# Altium PCB CW308T_87C51.PcbDoc
Units mil, origin at the board's own origin, x right, y up, seen from the top; angles counter-clockwise.
Board outline 2185.04 x 3326.77 mil, 2 copper layers (Top Layer, Bottom Layer); 43 components, 64 nets, 324 pads, 74 vias.
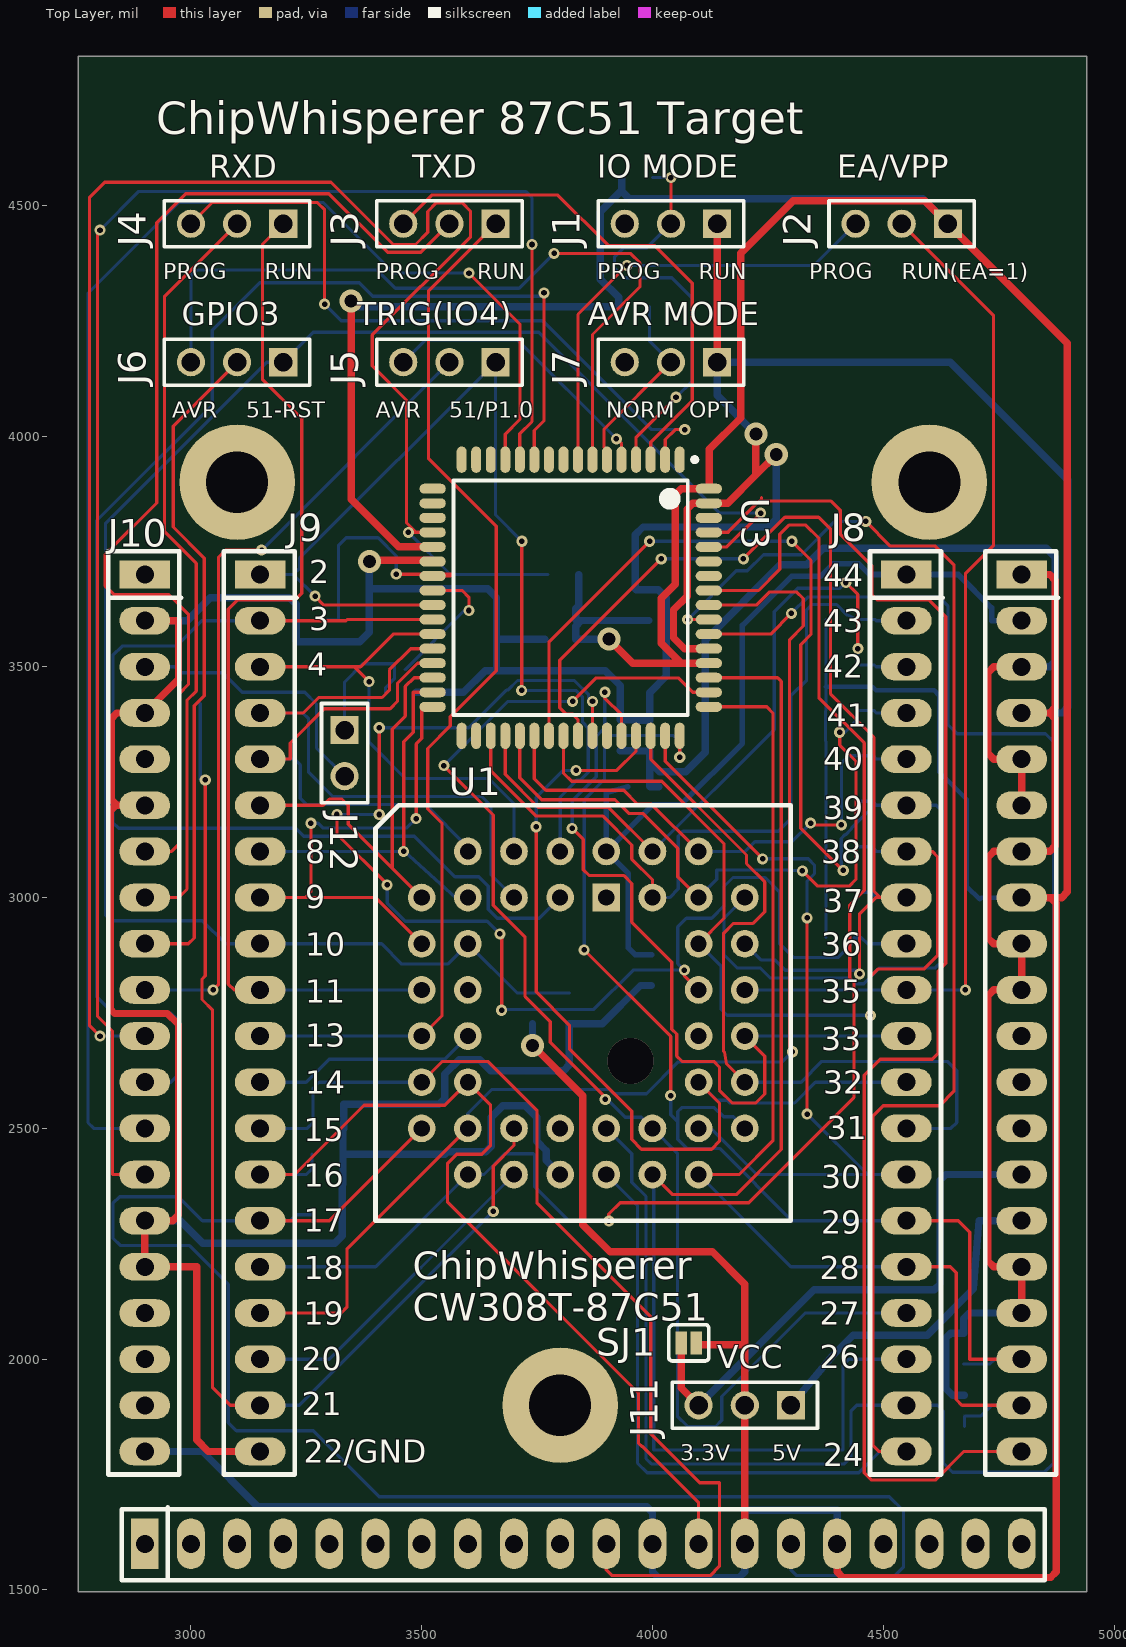
[diagram p0: Top Layer view]
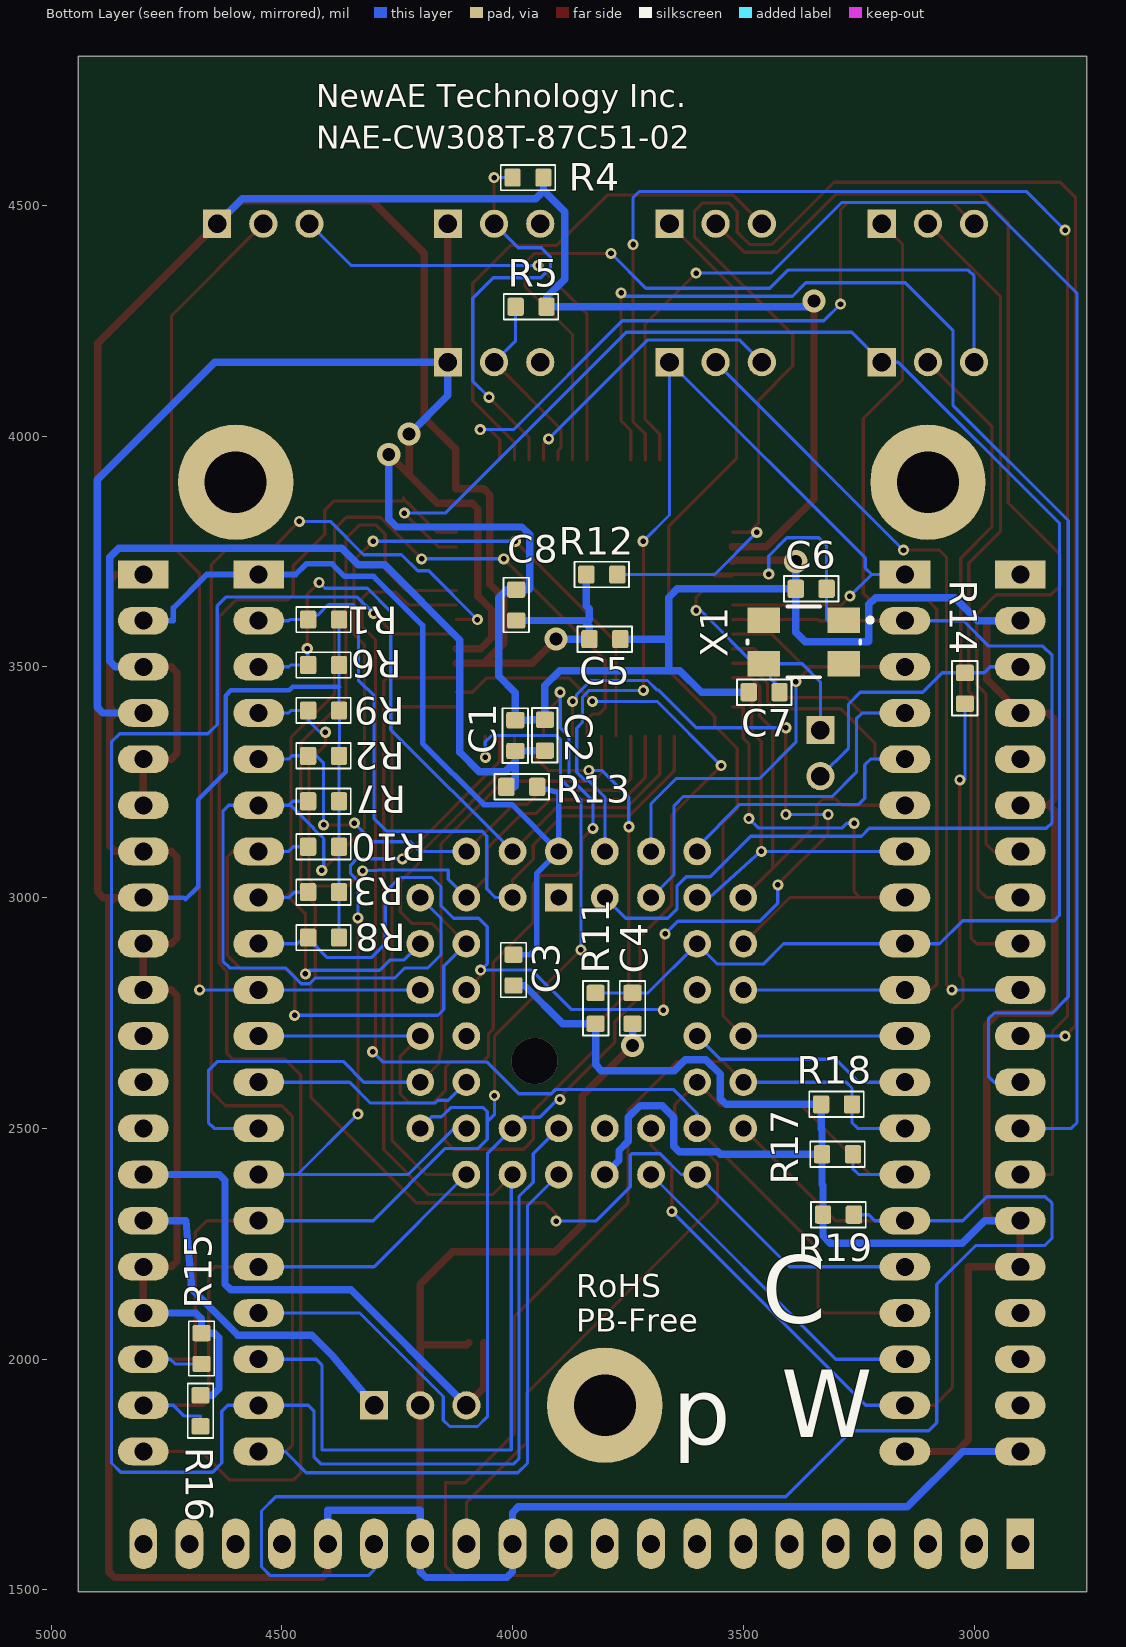
[diagram p1: Bottom Layer view, seen from below]

## Layer stack, top to bottom
Top Solder: solder mask 0.4, Solder Resist, Dk 3.5
Top Layer: signal copper 1.4
Dielectric 1: dielectric 12.6, FR-4, Dk 4.8
Bottom Layer: signal copper 1.4
Bottom Solder: solder mask 0.4, Solder Resist, Dk 3.5

## Board outline
2755.91,1496.06 2755.91,4822.83 4940.94,4822.83 4940.94,1496.06

## Design rules (kind name [scope] priority, off if disabled: settings)
BoardOutlineClearance [All] p1: gap=20 ignorepadtopadclearanceinfootprint=FALSE except(0: Arc-SplitContinuation Track-SplitContinuation SMDPad-SplitContinuation THPad-SplitContinuation Via-SplitContinuation Fill-SplitContinuation Poly-SplitContinuation Region-SplitContinuation Text-SplitContinuation)
Clearance Clearance_VCC [InNetClass('PWR')] p1: gap=10 ignorepadtopadclearanceinfootprint=FALSE except(0: Arc-Hole Track-Hole SMDPad-Hole THPad-Hole Via-Hole Fill-Hole Poly-Hole Region-Hole Text-Hole)
Clearance Clearance_SENSITIVE [InNetClass('SENSITIVE')] p2: gap=11.81 ignorepadtopadclearanceinfootprint=FALSE except(0: Arc-Hole Track-Hole SMDPad-Hole THPad-Hole Via-Hole Fill-Hole Poly-Hole Region-Hole Text-Hole)
Clearance Clearance_NORMAL [All] p3: gap=6 ignorepadtopadclearanceinfootprint=FALSE except(0: Arc-Hole Track-Hole SMDPad-Hole THPad-Hole Via-Hole Fill-Hole Poly-Hole Region-Hole Text-Hole)
PolygonConnect [All] p1: connectstyle=Relief reliefconductorwidth=10 reliefentries=4 polygonreliefangle="90 Angle" airgapwidth=10
RoutingPriority RoutingPriority_SENSITIVE [InNetClass('SENSITIVE')] p1: routingpriority=10
RoutingPriority RoutingPriority_PWR [InNetClass('PWR')] p2: routingpriority=1
RoutingPriority RoutingPriority_ALL [All] p3: routingpriority=0
RoutingVias RoutingVias_PWR [InNetClass('PWR')] p1: holewidth=28 width=50 viastyle="Through Hole" minholewidth=26 minwidth=50 maxholewidth=28 maxwidth=50
RoutingVias [All] p2: holewidth=12 width=24 viastyle="Through Hole" minholewidth=12 minwidth=30 maxholewidth=28 maxwidth=50
SolderMaskExpansion [All] p1: expansion=4
Width Width_SENS [InNetClass('SENSITIVE')] p1: maxlimit=20 minlimit=10 preferedwidth=12 minimp=50.000000 maximp=50.000000 favimp=50.000000
Width WIDTH_PWR [InNetClass('PWR')] p2: maxlimit=100 minlimit=10 preferedwidth=16
Width [All] p3: maxlimit=100 minlimit=6 preferedwidth=7 minimp=50.000000 maximp=50.000000 favimp=50.000000
29 further rules are at their usual default settings.

## Classes and differential pairs
component class CW308T_87C51_CPU: C1 C2 C3 C4 C5 C6 C7 C8 J1 J2 J3 J4 J5 J6 J7 J8 J9 J12 R1 R2 R3 R4 R5 R6 R7 R8 R9 R10 R11 R12 R13 R14 R15 R16 U1 U3 X1
component class CW308T_87C51_CWCONN: J10 J11 R17 R18 R19 SJ1
net class SENSITIVE: SHUNTL
net class PWR: GND NetJ10_C14 NetJ10_C15 SHUNTH VCC
net class CLK: CLK NetJ9_19

## Components (designator, comment, footprint, x,y, rotation, side; value= is the part's Value field where it differs from the comment)
C1 "approved sub OK" CAPC1608X90N 3994,3351 r90 bottom value=100n
C2 "approved sub OK" CAPC1608X90N 3930,3352 r90 bottom value=100n
C3 "approved sub OK" CAPC1608X90N 3998,2843 r90 bottom value=100n
C4 "approved sub OK" CAPC1608X90N 3740,2760 r90 bottom value=100n
C5 "approved sub OK" CAPC1608X90N 3800,3560 r180 bottom value=100n
C6 "27p" CAPC1608X90N 3353,3669 r180 bottom
C7 "27p" CAPC1608X90N 3455,3445 r180 bottom
C8 "approved sub OK" CAPC1608X90N 3992.13,3633.86 r90 bottom value=100n
J1 "68000-203HLF" SMTC-TSW-103-07-X-S 4140,4460 r180 top
J2 "68000-203HLF" SMTC-TSW-103-07-X-S 4640,4460 r180 top
J3 "68000-203HLF" SMTC-TSW-103-07-X-S 3660,4460 r180 top
J4 "68000-203HLF" SMTC-TSW-103-07-X-S 3200,4460 r180 top
J5 "68000-203HLF" SMTC-TSW-103-07-X-S 3660,4160 r180 top
J6 "68000-203HLF" SMTC-TSW-103-07-X-S 3200,4160 r180 top
J7 "68000-203HLF" SMTC-TSW-103-07-X-S 4140,4160 r180 top
J8 "20-Pin Header" 801-87-020-10-001101 4550,3700 r0 top
J9 "20-Pin Header" 801-87-020-10-001101 3150,3700 r0 top
J10 "CW308_TARGETCON" CW308_TBOARD_CONN 2900,3700 r0 top locked
J11 "68000-203HLF" SMTC-TSW-103-07-X-S 4300,1900 r180 top
J12 "DW-02-16-G-S-200" SMTC-DW-02-16-X-S-200 3333,3363 r270 top
R1 "Thick Film" RESC1608X55N 4409.45,3602.36 r0 bottom value=10K
R2 "Thick Film" RESC1608X55N 4409.45,3307.09 r0 bottom value=10K
R3 "Thick Film" RESC1608X55N 4409.45,3011.81 r0 bottom value=10K
R4 "Thick Film" RESC1608X55N 3966.54,4560 r0 bottom value=10K
R5 "Thick Film" RESC1608X55N 3960,4280 r180 bottom value=10K
R6 "Thick Film" RESC1608X55N 4409.45,3503.94 r0 bottom value=10K
R7 "Thick Film" RESC1608X55N 4409.45,3208.66 r0 bottom value=10K
R8 "Thick Film" RESC1608X55N 4409.45,2913.39 r0 bottom value=10K
R9 "Thick Film" RESC1608X55N 4409.45,3405.51 r0 bottom value=10K
R10 "Thick Film" RESC1608X55N 4409.45,3110.24 r0 bottom value=10K
R11 "Thick Film" RESC1608X55N 3820,2760 r270 bottom value=10K
R12 "Thick Film" RESC1608X55N 3806.54,3700 r180 bottom value=10K
R13 "Thick Film" RESC1608X55N 3980,3240 r180 bottom value=51R
R14 "Thick Film" RESC1608X55N 3020,3453.46 r90 bottom value=51R
R15 "Thick Film" RESC1608X55N 4674,2023 r90 bottom value=10K
R16 "Thick Film" RESC1608X55N 4676,1888 r90 bottom value=10K
R17 "Thick Film" RESC1608X55N 3296,2444 r0 bottom value=10K
R18 "Thick Film" RESC1608X55N 3298,2552 r0 bottom value=10K
R19 "Thick Film" RESC1608X55N 3294,2313 r180 bottom value=10K
SJ1 "NC" SJ_2S_NC 4078.74,2035.43 r0 top
U1 "87C51" PLCC44_SOCKET 3500,3100 r0 top
U3 "ATmega325PA-AU" 64A_L 3822.83,3649.61 r270 top
X1 "ABMM2-8.000MHZ-E2-T" ABRA-ABMM2-4_V 3369,3554 r0 bottom

## Footprints (in the part's own frame and the unit in brackets; to place one, negate y for a bottom-side part, rotate by r counter-clockwise, add the part's x,y. Pads: shape width x height; smd on the part's side, far side on the other; paste and mask are expansions set on the pad)
64A_L [mm] "Thin QFP, 64-Leads, Body 14x14mm, Pitch 0.8mm, IPC High Density"
  oval 1.45x0.55 smd: 1(-7.6,6) 2(-7.6,5.2) 3(-7.6,4.4) 4(-7.6,3.6) 5(-7.6,2.8) 6(-7.6,2) 7(-7.6,1.2) 8(-7.6,0.4) 9(-7.6,-0.4) 10(-7.6,-1.2) 11(-7.6,-2) 12(-7.6,-2.8) 13(-7.6,-3.6) 14(-7.6,-4.4) 15(-7.6,-5.2) 16(-7.6,-6) 33(7.6,-6) 34(7.6,-5.2) 35(7.6,-4.4) 36(7.6,-3.6) 37(7.6,-2.8) 38(7.6,-2) 39(7.6,-1.2) 40(7.6,-0.4) 41(7.6,0.4) 42(7.6,1.2) 43(7.6,2) 44(7.6,2.8) 45(7.6,3.6) 46(7.6,4.4) 47(7.6,5.2) 48(7.6,6)
  oval 0.55x1.45 smd: 17(-6,-7.6) 18(-5.2,-7.6) 19(-4.4,-7.6) 20(-3.6,-7.6) 21(-2.8,-7.6) 22(-2,-7.6) 23(-1.2,-7.6) 24(-0.4,-7.6) 25(0.4,-7.6) 26(1.2,-7.6) 27(2,-7.6) 28(2.8,-7.6) 29(3.6,-7.6) 30(4.4,-7.6) 31(5.2,-7.6) 32(6,-7.6) 49(6,7.6) 50(5.2,7.6) 51(4.4,7.6) 52(3.6,7.6) 53(2.8,7.6) 54(2,7.6) 55(1.2,7.6) 56(0.4,7.6) 57(-0.4,7.6) 58(-1.2,7.6) 59(-2,7.6) 60(-2.8,7.6) 61(-3.6,7.6) 62(-4.4,7.6) 63(-5.2,7.6) 64(-6,7.6)
  silkscreen extent -7.72,-6.45 6.45,6.95, body extent -7,-7 7,7, height 1.6
801-87-020-10-001101 [mil]
  rect 110x60 hole 39: 1(0,0)
  oval 110x60 hole 39: 2(0,-100) 3(0,-200) 4(0,-300) 5(0,-400) 6(0,-500) 7(0,-600) 8(0,-700) 9(0,-800) 10(0,-900) 11(0,-1000) 12(0,-1100) 13(0,-1200) 14(0,-1300) 15(0,-1400) 16(0,-1500) 17(0,-1600) 18(0,-1700) 19(0,-1800) 20(0,-1900)
  silkscreen extent -79,-1950 79,50, body extent -50,-1950 50,50, height 224
ABRA-ABMM2-4_V [mm] "SMD, 4-Leads, Body 6.2x3.9mm, Pitch 4.4mm, Height 1.2mm"
  rect 1.8x1.4 smd: 1(-2.2,-1.2) 2(2.2,-1.2) 3(2.2,1.2) 4(-2.2,1.2)
  silkscreen extent -3.77,-1.95 3.1,1.95, body extent -3.1,-1.95 3.1,1.95, height 1.2
CAPC1608X90N [mm] "Chip Capacitor, Body 1.6x0.8mm, EIA 0603, IPC Medium Density"
  round 0.254 on Mech15: 0(0,0)
  rrect25% 0.9x1 smd: 1(-0.85,0) 2(0.85,0)
  Top Layer pour cut-out: -0.6,0.5 -0.4,0.7 0.4,0.7 0.6,0.5 0.6,-0.5 0.4,-0.7 -0.4,-0.7 -0.6,-0.5
  silkscreen extent -1.5,-0.7 1.5,0.7, body extent -0.85,-0.45 0.85,0.45, height 0.89
CW308_TBOARD_CONN [mil]
  rect 110x60 hole 39: A1(0,0) C1(1900,0)
  oval 110x60 hole 39: A2(0,-100) A3(0,-200) A4(0,-300) A5(0,-400) A6(0,-500) A7(0,-600) A8(0,-700) A9(0,-800) A10(0,-900) A11(0,-1000) A12(0,-1100) A13(0,-1200) A14(0,-1300) A15(0,-1400) A16(0,-1500) A17(0,-1600) A18(0,-1700) A19(0,-1800) A20(0,-1900) C2(1900,-100) C3(1900,-200) C4(1900,-300) C5(1900,-400) C6(1900,-500) C7(1900,-600) C8(1900,-700) C9(1900,-800) C10(1900,-900) C11(1900,-1000) C12(1900,-1100) C13(1900,-1200) C14(1900,-1300) C15(1900,-1400) C16(1900,-1500) C17(1900,-1600) C18(1900,-1700) C19(1900,-1800) C20(1900,-1900)
  rect 60x110 hole 39: B1(0,-2100)
  oval 60x110 hole 39: B2(100,-2100) B3(200,-2100) B4(300,-2100) B5(400,-2100) B6(500,-2100) B7(600,-2100) B8(700,-2100) B9(800,-2100) B10(900,-2100) B11(1000,-2100) B12(1100,-2100) B13(1200,-2100) B14(1300,-2100) B15(1400,-2100) B16(1500,-2100) B17(1600,-2100) B18(1700,-2100) B19(1800,-2100) B20(1900,-2100)
  round 250 hole 134: MH1(200,200) MH2(900,-1800) MH2(1700,200)
  silkscreen extent -79,-2179 1979,50, body extent -50,-2150 1950,50, height 224
PLCC44_SOCKET [mil]
  rect 60x60 hole 35: 1(400,-100)
  round 60 hole 35: 2(300,0) 3(300,-100) 4(200,0) 5(200,-100) 6(100,0) 7(0,-100) 8(100,-100) 9(0,-200) 10(100,-200) 11(0,-300) 12(100,-300) 13(0,-400) 14(100,-400) 15(0,-500) 16(100,-500) 17(0,-600) 18(100,-700) 19(100,-600) 20(200,-700) 21(200,-600) 22(300,-700) 23(300,-600) 24(400,-700) 25(400,-600) 26(500,-700) 27(500,-600) 28(600,-700) 29(700,-600) 30(600,-600) 31(700,-500) 32(600,-500) 33(700,-400) 34(600,-400) 35(700,-300) 36(600,-300) 37(700,-200) 38(600,-200) 39(700,-100) 40(600,0) 41(600,-100) 42(500,0) 43(500,-100) 44(400,0)
  silkscreen extent -100,-800 800,100, body extent -92,-792 792,92, height 302
RESC1608X55N [mm] "Chip Resistor, Body 1.6x0.8mm, EIA 0603, IPC Medium Density"
  round 0.254 on Mech15: 0(0,0)
  rrect25% 0.9x1 smd: 1(-0.85,0) 2(0.85,0)
  Top Layer pour cut-out: -0.6,0.5 -0.4,0.7 0.4,0.7 0.6,0.5 0.6,-0.5 0.4,-0.7 -0.4,-0.7 -0.6,-0.5
  silkscreen extent -1.5,-0.7 1.5,0.7, body extent -0.87,-0.47 0.88,0.48, height 0.54
SJ_2S_NC [mil] "Solder Jumper, closed with solder paste"
  rect 25x50 smd: 1(-16.22,0) 2(16.22,0)
  silkscreen extent -43,-39 43,39
SMTC-DW-02-16-X-S-200 [mm] "Low Cost Board Spacer, 1x2 Pins, Vertical, 2.54mm Pitch, Male"
  rect 1.55x1.55 hole 1.02: 1(0,0)
  round 1.55 hole 1.02: 2(2.54,0)
  silkscreen extent -1.46,-1.27 4,1.27, body extent -1.4,-1.27 3.81,1.27, height 8.51
SMTC-TSW-103-07-X-S [mm] ".025 SQ Post Terminal Strip Assembly, 1x3 Pins, Vertical, 2.54mm Pitch, Male"
  rect 1.55x1.55 hole 1.02: 1(0,0)
  round 1.55 hole 1.02: 2(2.54,0) 3(5.08,0)
  silkscreen extent -1.46,-1.27 6.54,1.27, body extent -1.27,-1.27 6.35,1.27, height 8.38

## Part data
C1 C2 C3 C4 C5 C8: library part CAPC_100n_0603_X7R_50V_10%, "Capacitor SMD Cer 100nF 10% 50V X7R 0603", Manufacturer 1="AVX Corporation", Manufacturer 2="TDK Corporation", Manufacturer Part Number 1=06035C104KAT2A, Manufacturer Part Number 2=C1608X7R1H104K, Package / Case="0603 (1608 Metric)", Ratings="50V; X7R", Supplier Part Number 1=478-5052-1-ND, Tolerance=±10%, ComponentLink1Description=http://www.avx.com/docs/Catalogs/cx7r.pdf, ComponentLink1URL=http://www.avx.com/docs/Catalogs/cx7r.pdf, ComponentLink2Description=http://product.tdk.com/capacitor/mlcc/en/documents/mlcc_commercial_general_en.pdf, ComponentLink2URL=http://product.tdk.com/capacitor/mlcc/en/documents/mlcc_commercial_general_en.pdf, Material=ceramic, SCDType=spec, Supplier 1=Digi-Key, Supplier 2=Digi-Key, Supplier Part Number 2=445-1314-1-ND
C6 C7: library part CAPC_27p_0603_NP0_100V_1%, "Capacitor SMD Cer 27pF 1% 100V NP0 0603", Manufacturer 1="AVX Corporation", Manufacturer Part Number 1=06031A270FAT2A, Operating Temperature="-55°C ~ 125°C", Package / Case="0603 (1608 Metric)", Ratings="100V; NP0", Supplier Part Number 1=478-3681-1-ND, Tolerance=±1%, SCDType=undef, Supplier 1=Digi-Key
J1 J2 J3 J4 J5 J6 J7 J11: library part CMP-1024-00333-1, Manufacturer=Samtec, Supplier Part Number 1=609-3464-ND, Temperature Range="-55 to 125 degC", Mounting Technology=Through-hole, Orientation=Vertical, PackageDescription=".025[0.64] SQ. Post Terminal Strip Assembly", PartNumber=68000-203HLF, Pitch="2.54 mm", RoHS=True, Supplier 1=Digi-Key
J8 J9: library part 801-87-020-10-001101, "1x20 Header, Machined", Manufacture 1="Preci-Dip SA", Supplier Part Number 1=1212-1207-ND, Manufacture Part Number 1=801-87-020-10-001101, Supplier 1=Digi-Key
J10: library part CW308_TBOARD, "CW308 \"Standard\" Target Board Connector"
J12: library part CMP-1024-00001-1, Manufacturer=Samtec, Temperature Range="-55 to 125 degC", ComponentLink1Description="Manufacturer URL", ComponentLink1URL=http://www.samtec.com, ComponentLink2Description=Datasheet, ComponentLink2URL=http://www.samtec.com/documents/webfiles/pdf/DW.PDF, ComponentLink3Description="Package Specification", ComponentLink3URL=http://www.samtec.com/documents/webfiles/cpdf/XW-XX-XX-XXX-X-XXXX-XXX-XX-XXX-MKT1.PDF, DatasheetVersion=F-214, Mounting Technology=Through-hole, Orientation=Vertical, PackageDescription="Low Cost Board Spacer", PackageReference=DW-02-16-X-S-200, PackageVersion="AX, 8/1984", PartNumber=DW-02-16-G-S-200, Pitch="2.54 mm", RoHS=True
R1 R2 R3 R4 R5 R6 R7 R8 R9 R10 R11 R12 R15 R16 R17 R18 R19: library part RES_10K_0603_1%, "Resistor SMD chip 10k Ohm 0.1W 1% 0603", Manufacturer 1=Yageo, Manufacturer Part Number 1=RC0603FR-0710KL, Package / Case="0603 (1608 Metric)", Ratings=1/10W, Supplier Part Number 1=311-10.0KHRCT-ND, Tolerance=±1%, SCDType=spec, Supplier 1=Digi-Key
R13 R14: library part RES_51R_0603_1%, "Resistor SMD chip 51 Ohm 0.1W 1% 0603", Manufacturer 1=Yageo, Manufacturer Part Number 1=RC0603FR-0751RL, Package / Case="0603 (1608 metric)", Ratings="1/10 W", Supplier Part Number 1=311-51.0HRCT-ND, Tolerance=±1%, Material="Thick Film", SCDType=spec, Supplier 1=Digi-Key
SJ1: library part SJ_2S, "Solder Jumper, NC", Component Group="PCB Feature", Component Type="Standard (No BOM)", Mounting Technology=COPPER, Part Number=SJ_2S, Pin Count=2
U3: library part CMP-0095-00596-1, "8-bit AVR Microcontroller, 1.5-5.5V, 32KB Flash, 1KB EEPROM, 2KB SRAM, 64-pin TQFP, Industrial Grade (-40°C to 85°C)", Code_JEDEC=MS-026-AEB, ComponentLink1Description="Manufacturer URL", ComponentLink1URL=http://www.atmel.com/, ComponentLink2Description="ATmega165A/PA/325A/PA/3250A/PA/645A/P/6450A/P Datasheet", ComponentLink2URL=http://www.atmel.com/dyn/resources/prod_documents/doc8285.pdf, ComponentLink3Description="ATmega165A/PA/325A/PA/3250A/PA/645A/P/6450A/P Summary", ComponentLink3URL=http://www.atmel.com/dyn/resources/prod_documents/8285S.pdf, DatasheetVersion="revD, Jun-2011", PackageDescription="64-Pin Plastic Thin Profile Quad Flat Pack, 14 x 14 x 1.0 mm Body, 0.8 mm Pitch (TQFP)", PackageReference=64A, PackageVersion="revC, Oct-2010"
X1: library part CMP-0277-00003-1, "Ceramic Surface Mount Low Profile Quartz Crystal, 8 MHz, -20 to 70 degC, 4-Pin 6 x 3.6 x 1.2 mm SMD, RoHS, 1000pcs / Reel", Frequency="8 MHz", Load Capacitance CL="18 pF Typ.", Manufacturer=Abracon, Shunt Capacitance C0="7 pF Max.", Temperature Range="-20 to 70 degC", ComponentLink1Description="Manufacturer URL", ComponentLink1URL=http://www.abracon.com/, ComponentLink2Description=Datasheet, ComponentLink2URL=http://www.abracon.com/Resonators/ABMM2.pdf, ComponentLink3Description="Package Specification", ComponentLink3URL=http://www.abracon.com/Resonators/ABMM2.pdf, DatasheetVersion=Jan-13, ESR="72 Ohm Max.", Mounting Technology="Surface Mount", PackageDescription="4-Pin SMD, Body 6 x 3.6 mm, Pitch 4.4 mm", Packing="1000pcs / Reel", PartNumber=ABMM2-8.000MHZ-E2-T, RoHS=TRUE

## Via types
v1: diameter 24, hole 12, Top Layer to Bottom Layer, 53 vias
v2: diameter 24, hole 12, Top Layer to Bottom Layer, tented both sides, 14 vias
v3: diameter 50, hole 28, Top Layer to Bottom Layer, 6 vias
v4: diameter 100, hole 100, Top Layer to Bottom Layer, 1 vias

## Nets (pads, with @x,y where several pads share a name; then routed paths per layer and width w, separated by ;. In a path a pad name is that pad's centre, name@x,y a point inside that pad or via, vN(x,y) a via of type N, cw(c..) or ccw(c..) an arc to the next point about the centre after c; other vN are vias at no path point)
51_RESET: C4.2 J6.1 J9.9 R11.1 U1.10 U3.60 | length 3856.7
  Top Layer w7: U3.60 4161.34,3759.84 v1(4234.5,3833)
  Bottom Layer w7: R11.1 C4.2 3706.54,2793.46 U1.10 3556,2856 3457,2856 3413,2900 J9.9 3075,2900 3025,2950 2826.5,2950 2815,2961.5 2815,3811 3164,4160 J6.1 3265.01,4225.01 3753.99,4225.01 4146,3833 v1(4234.5,3833)
51_RX: J4.1 J9.10 U1.11 | length 2264.6
  Top Layer w7: J9.10 3093.5,2800 3081,2812.5 3081,3625 3101,3645 3226,3645 3240,3659 3240,4038 3155,4123 3155,4415 J4.1
  Bottom Layer w7: J9.10 U1.11
51_TX: J3.1 J9.11 U1.13 | length 2323.3
  Top Layer w7: U1.13 3544,2744 3544,3161 3513,3192 3513,3323 3562,3372 3562,3392 3661.42,3491.42 3661.42,3804.58 3515,3951 3515,4315 J3.1
  Bottom Layer w7: J9.11 U1.13
ALE/PROG: J8.11 U1.33 U3.44 | length 1828.9
  Top Layer w7: v1(3826,3150) 3850,3126 3850,3060.5 3862.5,3048 3937.5,3048 3955,3030.5 3955,2947 4042,2860 4042,2714.88 4052.37,2704.51 4052.37,2656.63 4064,2645 4133,2645 4145,2633 4145,2583 4173,2555 4224,2555 4243.5,2574.5 4243.5,2656.5 U1.33 ; v2(3896.81,3444.88) 3896.81,3432.19 3933.07,3395.93 U3.44
  Bottom Layer w7: v1(3826,3150) 3826,3210.04 3878,3262.04 3878,3349 3896.81,3367.81 v2(3896.81,3444.88) ; U1.33 J8.11
AVR_EA: J2.3 U3.8 | length 997.5
  Top Layer w7: U3.8 3838.58,4263.58 v1(3944.5,4369.5)
  Bottom Layer w7: v1(3944.5,4369.5) 4349.5,4369.5 J2.3
AVR_GPIO3: J6.3 U3.7 | length 1690.3
  Top Layer w7: v1(3786.73,4395.73) 3952.27,4395.73 3973,4375 3973,4323 3870.08,4220.08 U3.7
  Bottom Layer w7: J6.3 3000,4347 3012.5,4359.5 3403.5,4359.5 3443,4320 3711,4320 v1(3786.73,4395.73)
AVR_MODE1: J1.2 R4.2 U3.4 | length 911.8
  Top Layer w7: U3.4 3964.57,3997.57 v1(4051,4084) ; J1.2 v1(4040,4560)
  Bottom Layer w7: R4.2 v1(4040,4560) ; J1.2 3988,4408 3937.5,4408 3918,4388.5 3918,4363.5 3938.5,4343 4042,4343 4086,4299 4086,4119 v1(4051,4084)
AVR_MODE2: J7.2 R5.1 U3.6 | length 413.2
  Top Layer w7: U3.6 3901.57,3968.5 3895,3975.07 3895,4015 J7.2
  Bottom Layer w7: R5.1 3993.46,4206.54 J7.2
AVR_RST: J10.A11 R12.2 U3.20 | length 4105.1
  Top Layer w7: v1(2803,2700) 2780.5,2722.5 2780.5,4517.5 2813,4550 3303.49,4550 3438.49,4415 3486.51,4415 3513,4441.49 3513,4486.5 3531.5,4505 3587.5,4505 3606,4486.5 3606,4432 3393,4219 3393,4152 3467,4078 3467,3811.84 3487.5,3791.34 ; v2(3471,3791.34) 3487.5,3791.34 ; U3.20 3487.5,3791.34
  Bottom Layer w7: v1(2803,2700) J10.A11 ; v2(3471,3791.34) 3562.34,3700 R12.2
AVR_RX: J4.3 U3.2 | length 1507.7
  Top Layer w7: J4.3 3046,4506 3274,4506 3289.5,4490.5 v1(3289.5,4286) ; U3.2 4027.56,3992.56 4049,4014 v2(4070,4014)
  Bottom Layer w7: v1(3289.5,4286) 3325.5,4250 3762,4250 3998,4014 v2(4070,4014)
AVR_TRIG: J5.3 U3.5 | length 620.3
  Top Layer w7: v2(3922,3994) 3933.07,3982.93 U3.5
  Bottom Layer w7: J5.3 3508.01,4208.01 3707.99,4208.01 v2(3922,3994)
AVR_TX: J3.3 U3.3 | length 1150.1
  Top Layer w7: J3.3 3522,4522 3795,4522 3904,4413 4003.82,4413 4086,4330.82 4086,4076.43 3996.06,3986.5 U3.3
CLK: J10.A3 J12.2 R14.2 | length 587.1
  Bottom Layer w7: J10.A3 2965,3500 2978.07,3486.93 R14.2 3069,3486.93 3110.93,3445 3246.5,3445 3272,3419.5 3272,3324 J12.2
EA/VPP: J2.2 J8.10 U1.35 | length 2245.7
  Top Layer w7: J2.2 4739,4261 4739,3763 4678,3702 v1(4678,2800)
  Bottom Layer w7: U1.35 J8.10 v1(4678,2800)
GND: C1.2 C2.2 C3.1 C5.2 C6.1 C7.1 C8.2 J1.1 J7.1 J9.20 J10.A2 J10.A4 J10.A6 J10.A15 J10.A16 J10.C1 J10.C4 J10.C7 J10.C9 J10.C10 J10.C16 J10.C17 R11.2 R15.2 R16.2 R17.2 R18.2 R19.1 U1.22 U3.22 U3.53 U3.63 | length 12816.8
  Top Layer w16: J10.A6 2839.5,3200 ; J10.A2 2973,3600 2973,3473 J10.A4 2839.5,3400 2827,3387.5 2827,3212.5 2839.5,3200 ; J9.20 3037.5,1800 3012.5,1825 3012.5,2200 J10.A16 J10.A15 2960.5,2300 2973,2312.5 2973,2725 2949,2749 2834.5,2749 2825,2758.5 2825,3187.5 2837.5,3200 2839.5,3200 ; v3(3386.46,3728.35) 3388.91,3730.79 3521.18,3730.79 U3.22 ; U3.53 4069.41,3539.37 4045.5,3563.28 4045.5,3623.28 4075,3652.78 4075,3841.83 4087.5,3854.33 U3.63 4162.83,3854.33 4224,3915.5 ; J7.1 J1.1 ; v3(4224,4004) 4224,3915.5 ; v3(4268.25,3959.75) 4224,3915.5 ; J10.C17 J10.C16 4739.5,2200 4727,2212.5 4727,2787.5 4739.5,2800 J10.C10 J10.C9 4739.5,2900 4727,2912.5 4727,3087.5 4739.5,3100 J10.C7 4860.5,3100 4873,3112.5 4873,3387.5 4860.5,3400 ; J10.C4 4860.5,3400 ; J10.C1 4860.5,3700 4873,3687.5 4873,3412.5 4860.5,3400
  Bottom Layer w16: J10.A15 2977,2300 3026,2251 3311.5,2251 3327.46,2266.96 R19.1 3327.46,2377 3329.46,2379 R17.2 ; J10.A2 2992,3600 3042,3650 3213.5,3650 3228,3635.5 3228,3555 3229,3554 3365.46,3554 3386.46,3575 C6.1 ; v3(3386.46,3728.35) C6.1 ; C7.1 3590.67,3445 3637.48,3491.81 3897.69,3491.81 3930,3459.5 C2.2 3961,3385.46 3962,3384.46 C1.2 3994,3444 4030,3480 4030,3650 4012.68,3667.32 C8.2 3965,3667.32 3963,3669.32 3963,3786.5 3979.5,3803 4251,3803 4268.25,3820.25 v3(4268.25,3959.75) ; 3662,3492.13 3662,3560 ; C5.2 3662,3560 ; U1.22 3769.44,2430.56 3769.44,2452 3749,2472.44 3749,2524 3724,2549 3676,2549 3651,2524 3651,2461.5 3638.5,2449 3555,2449 3550,2444 R17.2 ; C3.1 3974,2809.54 3891,2726.54 R11.2 3820,2637.5 3807.5,2625 3650,2625 3626,2649 3581.12,2649 3550,2617.88 3550,2564.5 3537.5,2552 R18.2 3331.46,2499 3329.46,2497 R17.2 ; v3(4224,4004) 4140,4088 J7.1 4645,4160 4900,3905 4900,3412.5 4887.5,3400 J10.C4 ; R16.2 4650,1921.46 4636,1935.46 4636,2045.98 4646.48,2056.46 R15.2 4674,2087.5 4686.5,2100 J10.C17 ; C6.1 3643,3669 3662,3650 3662,3560
GPIO3: J6.2 J10.A9 | length 1454.1
  Top Layer w7: J10.A9 2994.5,2900 3007,2912.5 3007,3415.5 3029,3437.5 3029,3735.44 2961.5,3802.94 2961.5,4021.5 J6.2
GPIO4: J5.2 J10.A10 | length 1765.8
  Top Layer w7: v1(3048,2800) 3060,2812 3060,3738 3075,3753 v1(3153,3753)
  Bottom Layer w7: J10.A10 v1(3048,2800) ; v1(3153,3753) J5.2
LED1: J8.15 J10.C18 R15.1 U1.29 U3.48 | length 2643.8
  Top Layer w7: v1(3852,2886.5) 4039.37,2699.13 v1(4039.37,2570.87) ; v2(4059.06,3304) U3.48 ; J8.15 4662.5,2300 4687.5,2275 4687.5,2000 J10.C18
  Bottom Layer w7: v1(3852,2886.5) 3852,3212 3896,3256 3896,3341.92 3905.08,3351 4045.56,3351 4059.06,3337.5 v2(4059.06,3304) ; v1(4039.37,2570.87) 4039.37,2529.63 4055,2514 ; U1.29 4175,2525 4154,2525 4134,2545 4063.5,2545 4055,2536.5 4055,2514 ; J8.15 4301.96,2300 4145.46,2456.5 4074.5,2456.5 4055,2476 4055,2514 ; R15.1 4731,1989.54 4741.46,2000 J10.C18
LED2: J8.16 J10.C19 R16.1 U1.28 U3.49 | length 2486.3
  Top Layer w7: U1.28 4188,2400 4261,2473 4261,3400 4247.61,3413.39 U3.49 ; J8.16 4645.5,2200 4658,2187.5 4658,1912.5 4670.5,1900 J10.C19
  Bottom Layer w7: U1.28 4300,2200 J8.16 ; R16.1 4676,1876 4677,1877 4712,1877 4735,1900 J10.C19
LED3: J10.C20 U3.61 | length 3089.4
  Top Layer w7: U3.61 4164,3791.34 4164,3792.91 4225.59,3854.5 4227.16,3854.5 4231.66,3859 ; 4236.22,3866.14 4236.22,3863.56 4231.66,3859 ; J10.C20 4675,1800 4613,1738 4475,1738 4459,1754 4459,2615.5 4493.5,2650 4606.5,2650 4619,2662.5 4619,2840.79 4635.5,2857.29 4635.5,3608.5 4599,3645 4486.5,3645 4475,3656.5 4475,3719 4407,3787 4407,3839 4387,3859 4231.66,3859
M0: J9.13 J10.B11 R18.1 U1.15 | length 2238.9
  Top Layer w7: U1.15 3545,2645 3643,2645 3750,2538 3750,2338.01 3996.06,2091.95 3996.06,1838.58 4102.36,1732.28 4145,1732.28 4145,1551 4125,1531 3912.5,1531 3900,1543.5 J10.B11
  Bottom Layer w7: J9.13 3252.04,2500 3264.54,2512.5 R18.1 3264.54,2587.5 3277.04,2600 U1.15
M1: J9.14 J10.B13 R17.1 U1.16 | length 1999.1
  Top Layer w7: J9.14 3225,2400 3375,2550 3550,2550 U1.16 3648.8,2551.2 3648.8,2462.5 3630.3,2444 3575.5,2444 3556,2424.5 3556,2340 3969.65,1926.35 3969.65,1817.75 3976.38,1811.02 3977.95,1811.02 4100,1688.98 J10.B13
  Bottom Layer w7: J9.14 3250.04,2400 3262.54,2412.5 R17.1
M2: J9.15 J10.B15 R19.2 U1.17 | length 3538.3
  Top Layer w7: J9.15 3300,2300 U1.17
  Bottom Layer w7: R19.2 3228,2313 3215,2300 J9.15 3025,2300 2973,2352 2845.5,2352 2831,2337.5 2831,2262.5 2847.5,2246 2997,2246 3081,2162 3081,1862.5 3098.5,1845 3265,1845 3408,1702 4513,1702 4544,1671 4544,1550 4525,1531 4312.5,1531 4300,1543.5 J10.B15
MISO: J10.A13 U3.13 | length 3358.6
  Top Layer w7: v1(3602.5,4353) 3713,4242.5 3713,4036 3681.1,4004.1 U3.13
  Bottom Layer w7: J10.A13 2789.5,2500 2777,2512.5 2777,4309.5 2973.5,4506 3287,4506 3440,4353 v1(3602.5,4353)
MOSI: J10.A14 U3.12 | length 3686.5
  Top Layer w7: v1(2803,4446) 2797.5,4440.5 2797.5,2743.5 2830,2711 2830,2400 J10.A14 ; U3.12 3712.6,4005 3739,4031.4 v1(3739,4415)
  Bottom Layer w7: v1(2803,4446) 2887,4530 3725,4530 3739,4516 v1(3739,4415)
NetC6_2: C6.2 U3.23 X1.1 | length 551.6
  Top Layer w7: v1(3444.88,3700.79) 3566.44,3700.79 3562.5,3696.85 U3.23
  Bottom Layer w7: X1.1 3318,3601.24 3319.54,3602.78 C6.2 3319.54,3762.5 3336.56,3779.53 3405.51,3779.53 3444.88,3740.16 v1(3444.88,3700.79)
NetC7_2: C7.2 J12.1 U3.24 X1.3 | length 603.3
  Top Layer w7: U3.24 3588,3665.35 3602.36,3650.99 v1(3602.36,3622.05)
  Bottom Layer w7: J12.1 3333,3467.18 3372.57,3506.76 3440.94,3506.76 3440.94,3474.25 3421.54,3454.84 C7.2 ; X1.3@3464,3494 3592.05,3622.05 v1(3602.36,3622.05)
NetJ9_12: J9.12 U1.14 | length 491.4
  Bottom Layer w7: J9.12 3249.61,2600 3299.61,2650 3550,2650 U1.14
NetJ9_18: J9.18 U1.20 | length 715.7
  Bottom Layer w7: J9.18 3300,2000 U1.20
NetJ9_19: J9.19 R14.1 U1.21 | length 2501.2
  Top Layer w7: v1(3031,3255) 3031,2830.21 3024,2823.21 3024,2779.15 3047,2756.15 3047,1938 3085,1900 J9.19 ; v1(3655,2320) 3655,2418 3700,2463 U1.21
  Bottom Layer w7: R14.1 3020,3256 3021,3255 v1(3031,3255) ; J9.19 3235,1900 v1(3655,2320)
NetJ10_C14: J10.C14 J11.3 SJ1.1 | length 1189.9
  Top Layer w16: SJ1.1 4062.52,1937.48 J11.3
  Bottom Layer w16: J11.3 4350,2150 4610.5,2150 4623,2162.5 4623,2387.5 4635.5,2400 J10.C14
NetJ10_C15: J10.C15 J11.1 | length 746.1
  Bottom Layer w16: J11.1 4390.5,2008 4434.5,2052 4595,2052 4695,2152 4707.5,2300 J10.C15
NetR1_1: 
P2.6: J8.14 U1.30 U3.47 | length 1694.7
  Top Layer w7: U3.47 4027.56,3294.94 v1(4238.5,3084) ; v1(4335,2531) v1(4335,2956)
  Bottom Layer w7: U1.30 4126,2500 4226,2400 4466,2400 ; v1(4238.5,3084) 4337.5,3084 4351,3070.5 4351,3052 4335,3036 v1(4335,2956) ; v1(4335,2531) 4466,2400 ; J8.14 4485,2400 4466,2400
P2.7: J8.13 U1.31 U3.46 | length 1645
  Top Layer w7: U3.46 3996.06,3300 4203.78,3092.29 4203.78,3073.79 4243.5,3034.06 4243.5,2969.5 4218,2944 4175.5,2944 4154,2922.5 4154,2667 4156,2665 4160.5,2639.5 U1.31
  Bottom Layer w7: U1.31 4322,2600 4367,2645 4639,2645 4659,2625 4659,2512.5 4646.5,2500 J8.13
P3.6: J9.16 U1.18 U3.57 | length 3231.9
  Top Layer w7: v1(3905.51,2299.21) 3905.51,2314.51 3930,2339 4208.73,2339 4436.5,2566.77 4436.5,2816.56 4427.32,2825.74 4427.32,2983.98 4459,3015.66 4459,3335.18 4414.42,3379.77 4413.23,3379.77 4361,3432 4361,3778 4332,3807 4295.54,3807 4276,3787.46 4276,3711.35 4230,3665.35 U3.57
  Bottom Layer w7: J9.16 3400,2200 U1.18 3635,2400 3680,2445 3742,2445 3745,2442 3745,2373.5 3819.29,2299.21 v1(3905.51,2299.21)
P3.7: J9.17 U1.19 U3.56 | length 2706.3
  Top Layer w7: J9.17 3325.5,2100 3338,2112.5 3338,2238 U1.19 ; U3.56 4224.86,3633.86 4253,3662 4312.5,3662 4326.5,3648 4326.5,3588.5 4297,3559 4297,2672 v1(4303,2666)
  Bottom Layer w7: U1.19 3600,2532.25 3652.24,2584.49 3906.54,2584.49 3916.04,2575 3987,2575 4056,2644 4281,2644 v1(4303,2666)
PA0: J5.1 J9.1 U1.2 U3.25 | length 2284.3
  Top Layer w7: v1(3269,3653) 3288.14,3633.86 U3.25 ; v1(3716.53,3448.81) 3716.53,3771.53 v1(3717,3772)
  Bottom Layer w7: J9.1 3222,3700 ; v1(3269,3653) 3222,3700 ; v1(3716.53,3448.81) 3833.59,3448.81 3848.5,3433.91 3848.5,3379.5 3861,3367 3861,3271.54 3843.55,3254.09 3836.09,3254.09 3800,3218 U1.2 ; v1(3717,3772) 3660,3829 J5.1 3236,3736 3236,3714 3222,3700
PA1: J9.2 U1.3 U3.26 | length 2190.3
  Top Layer w7: J9.2 3336,3600 3338.36,3602.36 U3.26
  Bottom Layer w7: J9.2 3023,3600 2968,3545 2851,3545 2831,3525 2831,3162.5 2843.5,3150 3227,3150 3244,3133 3484,3133 3572,3045 3624,3045 3644,3025 3644,2974.5 3663.5,2955 3755,2955 U1.3
PA2: J9.3 U1.4 U3.27 | length 1052.3
  Top Layer w7: J9.3 3354,3500 ; v1(3386,3468) 3354,3500 ; U3.27 3438.41,3570.87 3367.54,3500 3354,3500
  Bottom Layer w7: v1(3386,3468) 3386,3336.45 3464.45,3258 3645.48,3258 3700,3203.48 U1.4
PA3: J9.4 U1.5 U3.28 | length 1328
  Top Layer w7: J9.4 3243,3400 3276.58,3433.58 3414.16,3433.58 3430,3449.42 3430,3493.38 3475.99,3539.37 U3.28
  Bottom Layer w7: J9.4 3242.49,3400 3254.99,3387.5 3254.99,3271.51 3307.51,3218.99 3630,3218.99 3650,3198.99 3650,3050 U1.5
PA4: J9.5 U1.6 U3.29 | length 1084.2
  Top Layer w7: J9.5 3215,3300 3215,3335 3289,3409 3431.58,3409 3447.58,3425 3447.58,3464.58 3490.87,3507.87 U3.29
  Bottom Layer w7: J9.5 3224.5,3300 3237,3287.5 3237,3214.99 3250,3201.99 3507.36,3201.99 3600,3109.35 U1.6
PA5: J9.6 U1.7 U3.30 | length 940.3
  Top Layer w7: J9.6 3286.38,3200 3300,3213.62 3327.38,3213.62 3341,3200 3341,3159 3436.02,3063.98 ; U1.7 3436.02,3063.98 ; U3.30 3483.52,3476.38 3464.58,3457.44 3464.58,3393.24 3436.02,3364.68 3436.02,3063.98
PA6: J9.7 U1.8 U3.31 | length 883.6
  Top Layer w7: v1(3461,3100) 3461,3337.42 3481.58,3358 3481.58,3444.88 U3.31
  Bottom Layer w7: J9.7 v1(3461,3100) 3462,3100 3574,3000 U1.8
PA7: J9.8 U1.9 U3.32 | length 1069
  Top Layer w7: J9.8 3247.5,3000 ; v1(3260,3161) 3260,3012.5 3247.5,3000 ; v1(3488,3171) 3488,3333 3500,3345 3500,3413.39 U3.32 ; U1.9 3400,3000 3247.5,3000
  Bottom Layer w7: v1(3260,3161) 3275.5,3161 3285.5,3151 3468,3151 v1(3488,3171)
PA8: J8.20 U1.24 U3.55 | length 4143.9
  Top Layer w7: v2(4076,3602.36) U3.55 ; v1(4462,3815) 4515.5,3761.5 4612.5,3761.5 4653,3721 4653,2580 4622,2549 4500,2549 4477,2526 4477,1813.19 4490.19,1800 J8.20
  Bottom Layer w7: U1.24 3967.62,2332.38 3967.62,1774.88 3988.5,1754 4447,1754 4493,1800 J8.20 ; v2(4076,3602.36) 4181.64,3708 4205.57,3708 4240.57,3743 4322.94,3743 4394.94,3815 v1(4462,3815)
PA9: J8.19 U1.25 U3.54 | length 4507.3
  Top Layer w7: U3.54 4256.19,3570.87 v1(4301,3615.68)
  Bottom Layer w7: U1.25 3955,2445 3955,2383.48 3986,2352.48 3986,1784.62 3997.62,1773 4415.5,1773 4430,1787.5 4430,1887.5 4442.5,1900 J8.19 4617.5,1900 4630,1887.5 4630,1775 4650,1755 4849,1755 4869,1775 4869,3337.5 4851.5,3355 4660,3355 4640,3375 4640,3632 4621,3651 4336.32,3651 v1(4301,3615.68)
PA10: J8.18 U1.26 U3.51 | length 2846.9
  Top Layer w7: U1.26 4043.5,2356.5 4181.3,2356.5 4279,2454.2 4279,3468.38 4271,3476.38 U3.51
  Bottom Layer w7: U1.26 4003,2397 4003,1803 4413,1803 4413,1987.5 4425.5,2000 J8.18
PA11: J8.17 U1.27 U3.50 | length 2944.2
  Top Layer w7: v1(3548,3286) 3655,3179 3655,2983 3724,2914 3724,2785.5 3778.5,2731 3778.5,2686.5 v1@3899.82,2565.18 ; v2(3827,3425) 3878,3476 4055.88,3476 4087,3444.88 U3.50
  Bottom Layer w7: v1(3548,3286) 3687,3425 v2(3827,3425) ; v1(3897.64,2562.99) 3902.01,2562.99 3941,2524 3976,2524 U1.27 4054,2446 4054,1876 4076,1854 4136.5,1854 4150,1867.5 4150,1919 4331,2100 J8.17
PD0: J8.2 R1.2 U1.43 U3.35 | length 1718.5
  Top Layer w7: U3.35 3649.61,3274.45 3747.06,3177 3892,3177 3955,3114 3955,3083.48 4000,3038.48 U1.43
  Bottom Layer w7: U1.43 4037,3000 4056,3019 4056,3133.5 4066,3143.5 4272.5,3143.5 4300,3171 4300,3437 4334,3471 4334,3624 4345,3635 4399,3635 4421,3613 R1.2 4482.64,3602.36 4485,3600 J8.2
PD1: J8.3 R6.2 U1.42 U3.36 | length 1580.6
  Top Layer w7: U3.36 3681.1,3267 3753.1,3195 3905,3195 U1.42 ; v1(4419,3682.68) 4444.88,3656.8 v2(4444.88,3539.37)
  Bottom Layer w7: U1.42 4264,3364 4264,3619.7 4314.3,3670 4406.32,3670 v1(4419,3682.68) ; v2(4444.88,3539.37) 4444.88,3526.82 4442.91,3524.85 R6.2 4481.06,3503.94 4485,3500 J8.3
PD2: J8.4 R9.2 U1.41 U3.37 | length 1530.8
  Top Layer w7: U3.37 3712.6,3259.55 3760.14,3212 3918.83,3212 3948.52,3182.31 3979.21,3182.31 4055,3106.52 4055,3045 U1.41 ; v1(4324.95,3058) 4357.95,3025 4426.57,3025 4441,3039.43 4441,3295 4405.51,3330.49 v2(4405.51,3358.27)
  Bottom Layer w7: U1.41 4139.5,3039.5 4139.5,3059 4260.5,3060.5 v1(4324.95,3058) ; v2(4405.51,3358.27) 4417.18,3358.27 4442.91,3384 R9.2 4479.49,3405.51 4485,3400 J8.4
PD3: J8.5 R2.2 U1.40 U3.38 | length 1134.7
  Top Layer w7: U3.38 3744.09,3257.41 3769.06,3232.44 3937.58,3232.44 3967.56,3202.47 3997.53,3202.47 U1.40 ; v2(4342.52,3161.52) 4346.56,3157.48 v2(4409.45,3157.48)
  Bottom Layer w7: U1.40 4201,3100 4222,3121 4302,3121 v2(4342.52,3161.52) ; v2(4409.45,3157.48) 4409.45,3291.53 4425,3307.09 R2.2 4477.91,3307.09 4485,3300 J8.5
PD4: J8.6 R7.2 U1.39 U3.39 | length 2956.1
  Top Layer w7: U3.39 3775.59,3553.59 v1(3994,3772) ; v1(4302,3772) 4343.5,3730.5 4343.5,3570.75 4321.02,3548.27 4321.02,3149.94 4411.91,3059.06 v2(4413.39,3059.06)
  Bottom Layer w7: v1(3994,3772) v1(4302,3772) ; U1.39 4155,2955 4155,2876 4183.5,2847.5 4233.5,2847.5 4255.26,2825.74 4427.32,2825.74 4439.91,2813.15 4457.72,2813.15 4492.12,2847.54 4612.58,2847.54 4627.54,2862.5 4627.54,3187.5 4615.04,3200 J8.6 4485,3200 ; v2(4413.39,3059.06) 4409,3063.44 4409,3128 4416.98,3135.98 4418.35,3135.98 4430.95,3148.57 4430.95,3149.95 4481,3200 4485,3200 ; R7.2 4476.34,3208.66 4485,3200
PD5: J8.7 R10.2 U1.38 U3.40 | length 1868.6
  Top Layer w7: U3.40 3807.09,3269.91 3825,3252 4020.02,3252 4155,3117.02 4155,2955 U1.38 ; v1(4472,2745) 4472,2828.5 4488.5,2845 4588,2845 4618,2875 4618,3088 4606,3100 J8.7
  Bottom Layer w7: U1.38 4149,2851 4149,2757.5 4161.5,2745 v1(4472,2745) ; R10.2 4474.76,3110.24 4485,3100 J8.7
PD6: J8.8 R3.2 U1.37 U3.41 | length 2390.7
  Top Layer w7: U3.41 3838.58,3385.42 3826,3398 3812.5,3398 3799,3411.5 3799,3514 v1(4019,3734) ; v1(4197,3734) 4287,3824 4360,3824 4386,3798 4386,3441 4480,3347 4480,3013.5 4493.5,3000 ; v1(4448.82,2834.65) 4448.82,2965.32 4483.5,3000 4493.5,3000 ; J8.8 4493.5,3000
  Bottom Layer w7: v1(4019,3734) v1(4197,3734) ; U1.37 4235,2865 4264.92,2865 4287.4,2842.52 4440.94,2842.52 v1(4448.82,2834.65) ; R3.2 4473.19,3011.81 4485,3000 J8.8
PD7: J8.9 R8.2 U1.36 U3.42 | length 2890.6
  Top Layer w7: v1(3316.43,3180) 3316.43,3137.57 3425.2,3028.8 v1(3425.2,3027.56) ; v1(3408,3180) v1(3408,3368) ; v1(3669.29,2921.26) 3665.74,2921.26 3673.23,2913.77 v1(3673.23,2755.91) ; U3.42 v2(3870.07,3425.19) ; v1(4069,2843) 4069,2831 U1.36
  Bottom Layer w7: v1(3316.43,3180) v1(3408,3180) ; v1(3408,3368) 3602,3368 3683.5,3449.5 3686.81,3449.5 3707.62,3470.31 3830.48,3470.31 3861.5,3439.29 3861.5,3425.5 3861.81,3425.19 v2(3870.07,3425.19) ; v1(3425.2,3027.56) 3425.2,2988.19 3464.57,2948.82 3641.73,2948.82 v1(3669.29,2921.26) ; v1(3673.23,2755.91) 3675.08,2757.75 3872.75,2757.75 3958,2843 v1(4069,2843) 4055,2857 4055,2936.5 4073.5,2955 4128,2955 4155,2982 4155,3024 4174.5,3043.5 4244,3043.5 4276,3011.5 4276,2900 4305.92,2870.08 4401.24,2870.08 4442.91,2911.75 4438.13,2911.75 4436.5,2913.39 R8.2 4452.76,2913.39 4466.14,2900 J8.9
PSEN: J8.12 U1.32 U3.45 | length 1957.4
  Top Layer w7: v1(3748.03,3153.54) 3748.03,2795.7 3820,2723.74 3820,2672.13 3955,2537.13 3955,2476 3976,2455 4128,2455 4145,2472 4145,2555 U1.32 ; v2(3834.65,3275.59) 3922.59,3275.59 3964.57,3317.57 U3.45
  Bottom Layer w7: v1(3748.03,3153.54) 3748.03,3217.03 3806.59,3275.59 v2(3834.65,3275.59) ; U1.32 4139,2561 4161.5,2561 4167.5,2555 4308,2555 4353,2600 J8.12
RX: J4.2 J10.A8 | length 1642.4
  Top Layer w7: J10.A8 2973,3000 2991.5,3018.5 2991.5,3427.5 3011.5,3447.5 3011.5,3724.13 2943,3792.63 2943,4303 J4.2
SCK: J10.A12 U3.11 | length 3085.8
  Top Layer w7: U3.11 3744.09,4012 3765,4032.91 v1(3765,4310)
  Bottom Layer w7: J10.A12 2956.5,2600 2969,2612.5 2969,2737.5 2956.5,2750 2831,2750 2796,2785 2796,3817 3046,4067 3046,4229 3149,4332 3364.5,4332 3393.5,4303 3758,4303 v1(3765,4310)
SHUNTH: C1.1 C2.1 J10.C3 J10.C5 J10.C6 R13.1 | length 2134
  Top Layer w16: J10.C6 J10.C5 4739.5,3300 4727,3312.5 4727,3487.5 4739.5,3500 J10.C3
  Bottom Layer w16: C2.1 3961,3318.54 3962,3317.54 C1.1 3994,3294.5 ; R13.1 3995,3240 3994,3241 3994,3294.5 ; J10.C3 4860.5,3500 4873,3512.5 4873,3737.5 4853.5,3757 4370.34,3757 4334.1,3720.77 4277,3720.77 4114,3557.77 4114,3315 4072,3273 4015.5,3273 3994,3294.5
SHUNTL: C3.2 J8.1 J10.C2 R13.2 U1.44 | length 1835.5
  Bottom Layer w12: R13.2 3900,3227.5 U1.44 ; C3.2 3962.5,2876.46 3948,2890.96 3948,3052 U1.44 ; J10.C2 4735,3600 4735,3627.5 4662.5,3700 J8.1 4470,3700 4447,3723 4391,3723 4364,3696 4301.3,3696 4195,3589.7 4195,3334 4062.27,3201.27 4001.27,3201.27 U1.44
TX: J3.2 J10.A7 | length 2364
  Top Layer w7: J10.A7 2958,3100 2974.5,3116.5 2974.5,3441.65 2994.5,3461.65 2994.5,3614 2952.5,3656 2833.5,3656 2814.5,3675 2814.5,3743.5 2926,3855 2926,4462 2989,4525 3299,4525 3426,4398 3498,4398 J3.2
VCC: C4.1 C5.1 C8.1 J2.1 J10.A20 J10.B12 J10.B14 J10.B16 J10.C8 J11.2 R1.1 R2.1 R3.1 R4.1 R5.2 R6.1 R7.1 R8.1 R9.1 R10.1 R12.1 SJ1.2 U3.21 U3.52 U3.64 | length 13069.5
  Top Layer w16: v3(3347,4292.5) 3347,3862.84 3450,3759.84 U3.21 ; v3(3740,2680) 3849,2571 3849,2291.25 3907.97,2232.28 4129.92,2232.28 4200,2162.2 4200,2031.5 ; v3(3905.5,3560) 3957.63,3507.87 4062.5,3507.87 ; SJ1.2 4098.89,2031.5 4200,2031.5 ; U3.52 4062.5,3507.87 ; J10.B14 J11.2 4200,2031.5 ; J10.B16 4400,1539.5 4412.5,1527 4862.5,1527 4875,1539.5 4875,2987.5 4862.5,3000 ; J10.C8 4862.5,3000 ; 4062.5,3507.87 4019,3551.37 4019,3648.78 4049,3678.78 4049,3872.33 4062.5,3885.83 U3.64 4123,3885.83 4123,3971 4191,4039 4191,4396 4305,4510 4590,4510 J2.1 4899,4201 4899,3012.5 4886.5,3000 4862.5,3000
  Bottom Layer w7: R8.1 R3.1 R10.1 R7.1 R2.1 4375.98,3338 4374.98,3339 4374.98,3404.51 R9.1 4375.98,3456.69 R6.1 R1.1
  Bottom Layer w10: 4375.98,3456.69 4476.38,3456.69 4484.25,3448.82 4610.24,3448.82 4621.5,3437.56 4621.5,3272.2 4681.1,3212.6 4681.1,3023.62 4708.66,2996.06 4712.6,3000 J10.C8
  Bottom Layer w16: J10.A20 3025,1800 3145,1680 3987.5,1680 4000,1667.5 J10.B12 4000,1539.5 4012.5,1527 4187.5,1527 4200,1539.5 J10.B14 4200,1673 4400,1673 J10.B16 ; v3(3347,4292.5) 3359.5,4280 R5.2 3926.54,4300.55 3887,4340.09 3887,4486 3932.5,4531.5 ; v3(3740,2680) C4.1 ; R12.1 3840,3632.54 3833.46,3626 3833.46,3602.36 3835.43,3600.39 3846.36,3600.39 ; v3(3905.5,3560) C5.1 3833.46,3587.5 3846.36,3600.39 ; R4.1 3933.07,4532.07 3932.5,4531.5 ; C8.1 3846.36,3600.39 ; J2.1 4586,4514 3950,4514 3932.5,4531.5
pads on no net: C1.0 C2.0 C3.0 C4.0 C5.0 C6.0 C7.0 C8.0 J1.3 J7.3 J10.A1 J10.A5 J10.A17 J10.A18 J10.A19 J10.B1 J10.B2 J10.B3 J10.B4 J10.B5 J10.B6 J10.B7 J10.B8 J10.B9 J10.B10 J10.B17 J10.B18 J10.B19 J10.B20 J10.C11 J10.C12 J10.C13 J10.MH1 J10.MH2 R1.0 R2.0 R3.0 R4.0 R5.0 R6.0 R7.0 R8.0 R9.0 R10.0 R11.0 R12.0 R13.0 R14.0 R15.0 R16.0 R17.0 R18.0 R19.0 U1.1 U1.12 U1.23 U1.34 U3.1 U3.9 U3.10 U3.14 U3.15 U3.16 U3.17 U3.18 U3.19 U3.33 U3.34 U3.43 U3.58 U3.59 U3.62 X1.2 X1.4
copper on no net:
  other v4: 3952.76,2645.67

## Silkscreen, mask and mechanical layers (free items; w line width, h text height)
Top Overlay:
  text "ChipWhisperer 87C51 Target" at 2925.2,4629.92 h120
  text "RXD" at 3040,4560 h50
  text "TXD" at 3480,4560 h50
  text "IO MODE" at 3880,4560 h50
  text "EA/VPP" at 4400,4560 h50
  text "PROG" at 2940,4340 h35
  text "RUN" at 3160,4340 h35
  text "PROG" at 3400,4340 h35
  text "RUN" at 3620,4340 h35
  text "PROG" at 3880,4340 h35
  text "RUN" at 4100,4340 h35
  text "PROG" at 4340,4340 h35
  text "RUN(EA=1)" at 4540,4340 h35
  text "GPIO3" at 2980,4240 h50
  text "TRIG(IO4)" at 3360,4240 h50
  text "AVR MODE" at 3860,4240 h50
  text "AVR" at 2960,4040 h35
  text "51-RST" at 3120,4040 h35
  text "AVR" at 3400,4040 h35
  text "51/P1.0" at 3560,4040 h35
  text "NORM" at 3900,4040 h35
  text "OPT" at 4080,4040 h35
  text "2" at 3255.91,3681.1 h50
  text "44" at 4370.08,3673.23 h50
  text "3" at 3255.91,3578.74 h50
  text "43" at 4370.08,3574.8 h50
  text "4" at 3251.97,3480.32 h50
  text "42" at 4370.08,3476.38 h50
  text "41" at 4377.95,3370.08 h50
  text "40" at 4370.08,3275.59 h50
  text "39" at 4370.08,3169.29 h50
  text "8" at 3248.03,3074.8 h50
  text "38" at 4366.14,3074.8 h50
  text "9" at 3248.03,2976.38 h50
  text "37" at 4370.08,2968.5 h50
  text "10" at 3248.03,2874.02 h50
  text "36" at 4366.14,2874.02 h50
  text "11" at 3248.03,2771.65 h50
  text "35" at 4366.14,2771.65 h50
  text "13" at 3248.03,2677.17 h50
  text "33" at 4366.14,2669.29 h50
  text "14" at 3248.03,2574.8 h50
  text "32" at 4370.08,2574.8 h50
  text "31" at 4377.95,2476.38 h50
  text "15" at 3244.09,2472.44 h50
  text "16" at 3244.09,2374.02 h50
  text "30" at 4366.14,2370.08 h50
  text "17" at 3244.09,2275.59 h50
  text "29" at 4366.14,2271.65 h50
  text "18" at 3244.09,2173.23 h50
  text "28" at 4362.2,2173.23 h50
  text "ChipWhisperer / CW308T-87C51" at 3480.32,2082.68 h60
  text "19" at 3244.09,2074.8 h50
  text "27" at 4362.2,2074.8 h50
  text "VCC" at 4140,1980 h50
  text "26" at 4362.2,1980.32 h50
  text "20" at 3240.16,1976.38 h50
  text "21" at 3240.16,1877.95 h50
  text "3.3V" at 4060,1780 h35
  text "5V" at 4260,1780 h35
  text "22/GND" at 3244.09,1775.59 h50
  text "24" at 4370.08,1767.72 h50
Bottom Overlay:
  text "NewAE Technology Inc." at 4425.2,4712.6 h50
  text "NAE-CW308T-87C51-02" at 4425.2,4622.05 h50
  text "RoHS / PB-Free" at 3862.2,2059.06 h50
  text "C" at 3460.63,2031.5 h250
  text "W" at 3417.32,1783.46 h250
  text "p" at 3653.54,1767.72 h250
Mechanical 1:
  lines w10: 2755.91,1496.06 2755.91,4822.83 2775.59,4822.83 4940.94,4822.83 4940.94,1496.06 2755.91,1496.06